# Altium PCB PCB1.PcbDoc
Units mm, origin at the board's own origin, x right, y up, seen from the top; angles counter-clockwise.
Board outline 99.5 x 59.5 mm, 2 copper layers (Top Layer, Bottom Layer); 9 components, 5 nets, 22 pads, 4 vias.
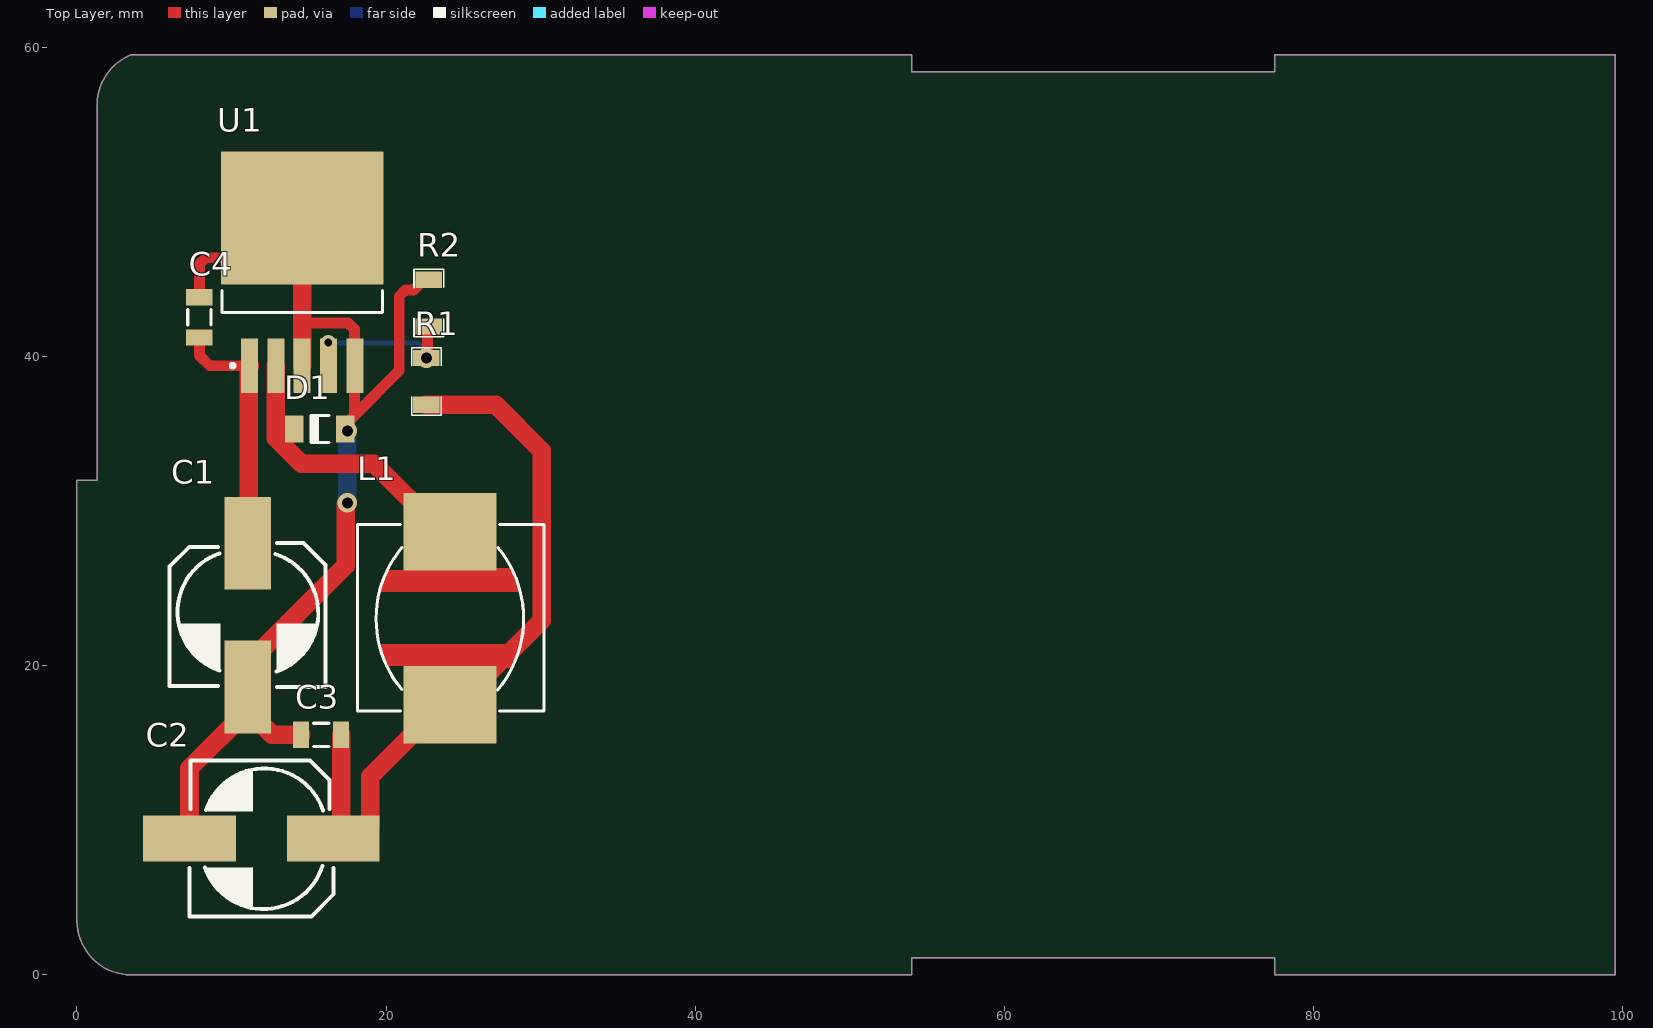
[diagram p0: Top Layer view]
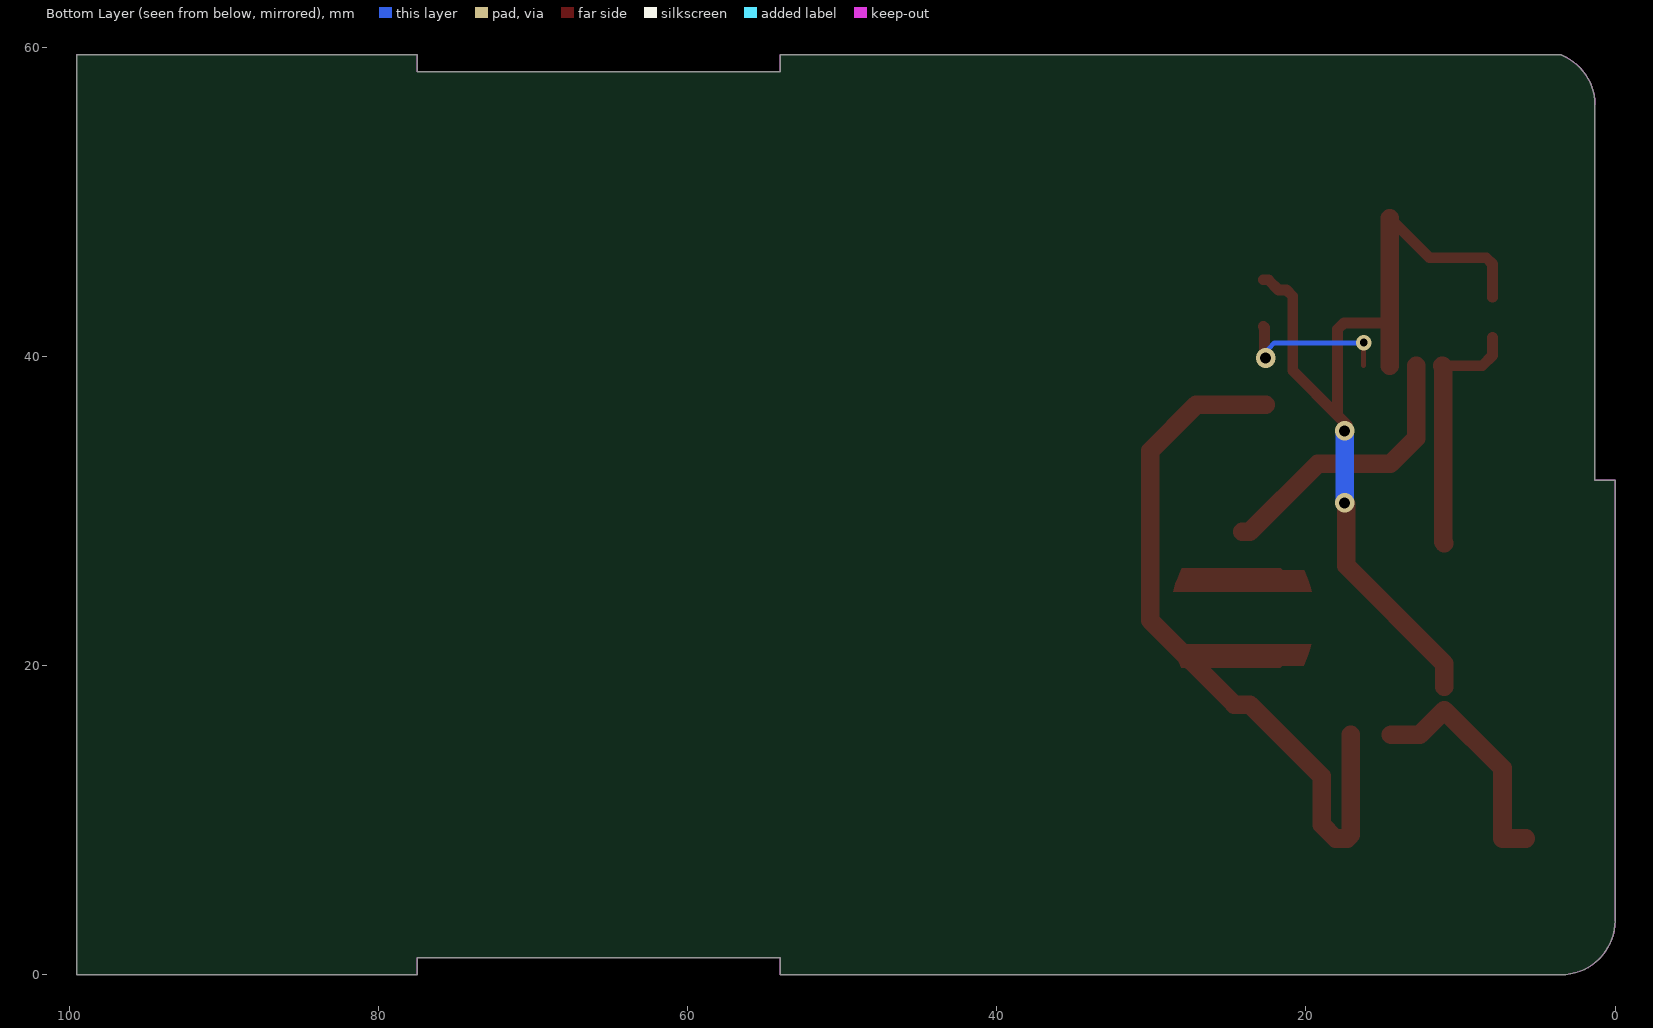
[diagram p1: Bottom Layer view, seen from below]
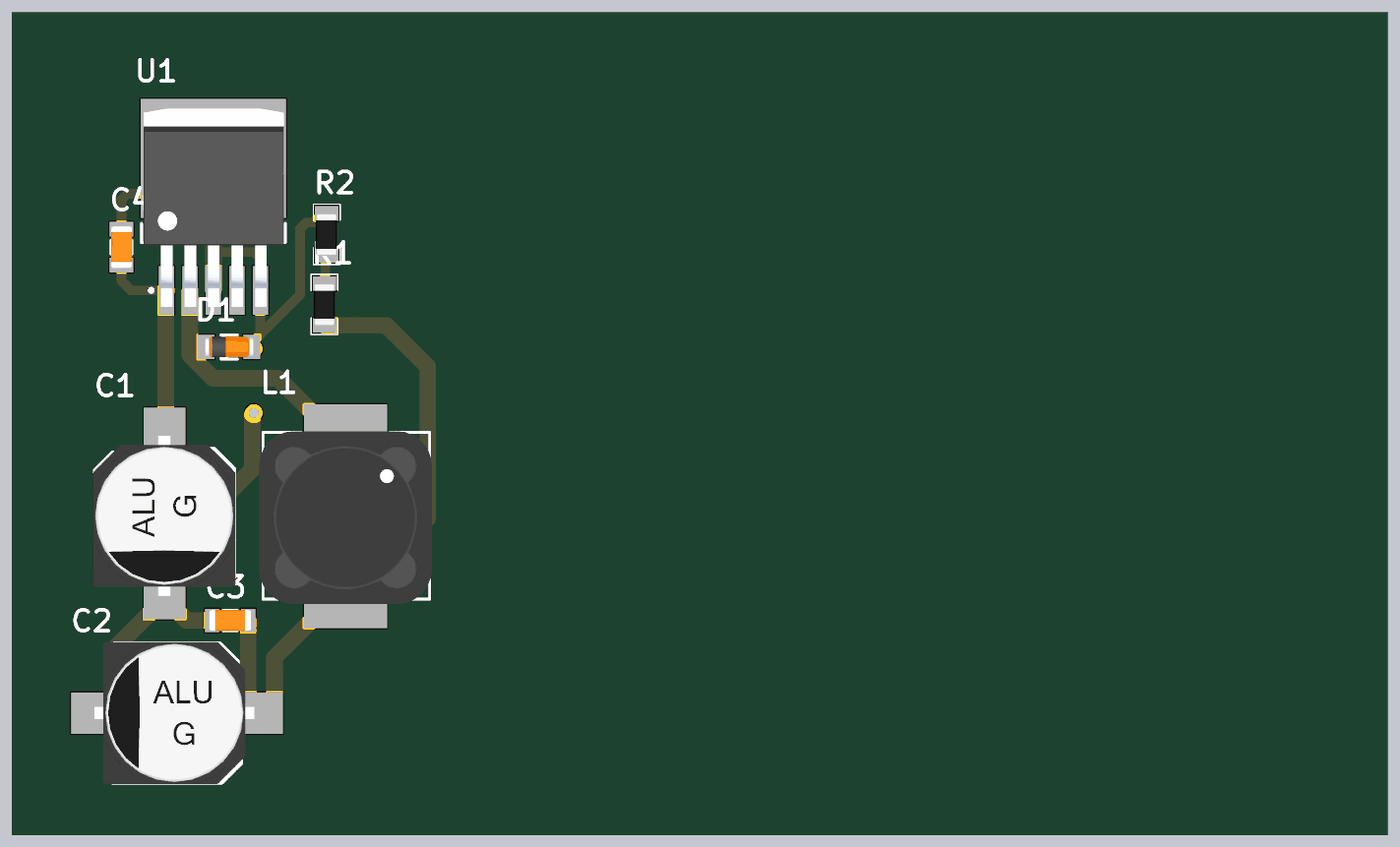
[diagram p2: 3D render of the assembled board from above, using the file's embedded part models]

## Layer stack, top to bottom
Top Solder: solder mask 0.0102, Solder Resist, Dk 3.5
Top Layer: signal copper 0.0356
Dielectric 1: dielectric 0.32, FR-4, Dk 4.8
Bottom Layer: signal copper 0.0356
Bottom Solder: solder mask 0.0102, Solder Resist, Dk 3.5

## Board outline
3.5,0 cw(c3.502,3.497) 0.005,3.5 0.005,32 1.304,32 1.304,56.282 cw(c4.804,56.252) 3.5,59.5 54,59.5 54,58.4 77.5,58.4 77.5,59.5 99.5,59.5 99.5,0 77.5,0 77.5,1.1 54,1.1 54,0

## Design rules (kind name [scope] priority, off if disabled: settings)
Clearance [All] p1: gap=0.254 ignorepadtopadclearanceinfootprint=FALSE except(0: Arc-Hole Track-Hole SMDPad-Hole THPad-Hole Via-Hole Fill-Hole Poly-Hole Region-Hole Text-Hole)
PolygonConnect [All] p1: connectstyle=Relief reliefconductorwidth=0.254 reliefentries=4 polygonreliefangle="90 Angle" airgapwidth=0.254
RoutingVias [All] p1: holewidth=0.711 width=1.27 viastyle="Through Hole" minholewidth=0.711 minwidth=1.27 maxholewidth=0.711 maxwidth=1.27
SolderMaskExpansion [All] p1: expansion=0.102 istentingtop=FALSE
Width [All] p1: maxlimit=1.2 minlimit=0.3 preferedwidth=0.7
30 further rules are at their usual default settings.

## Components (designator, comment, footprint, x,y, rotation, side; value= is the part's Value field where it differs from the comment)
C1 "220uF" Cap_Al_9.3MM 11.049,27.918 r90 top
C2 "220uF" Cap_Al_9.3MM 16.586,8.814 r0 top
C3 "100nF" SMD_CAP_1206 17.094,15.519 r180 top
C4 "100nF" SMD_CAP_1206 7.925,41.224 r90 top
D1 "D?" LL4148 15.698,35.306 r180 top
L1 "Inductor" induc-smd 24.13,23.063 r270 top
R1 "200R" "SMD RES 1206" 22.606,38.379 r270 top
R2 "120R" "SMD RES 1206" 22.758,43.447 r270 top
U1 "LM2596" "LM2596 12V SMD" 19.308,36.729 r90 top

## Footprints (in the part's own frame and the unit in brackets; to place one, negate y for a bottom-side part, rotate by r counter-clockwise, add the part's x,y. Pads: shape width x height; smd on the part's side, far side on the other; paste and mask are expansions set on the pad)
Cap_Al_9.3MM [mm]
  rect 6x3 smd: 1(0,0) 2(-9.3,0)
  silkscreen extent -9.3,-5.03 0.02,5.05, body extent -10.63,-5.13 0.97,5.17, height 10.2
induc-smd [mm]
  rect 5x6 smd: 1(-5.588,0) 2(5.588,0)
  Top Layer region: -3.099,-4.026 -2.769,-4.153 -2.464,-4.28 -2.057,-4.407 -1.702,-4.508 -1.702,4.458 -1.981,4.381 -2.311,4.28 -2.591,4.178 -2.845,4.077 -2.946,4.026 -3.073,3.975 -3.226,3.899 -3.226,-2.502 -3.099,-2.629
  Top Layer region: 3.073,-4 2.743,-4.127 2.438,-4.254 2.032,-4.381 1.676,-4.483 1.676,4.483 1.956,4.407 2.286,4.305 2.565,4.204 2.819,4.102 2.921,4.051 3.048,4.001 3.2,3.924 3.2,-2.476 3.073,-2.603
  silkscreen extent -6.07,-5.97 5.99,6.1, body extent -6.15,-6.25 6.35,6.25, height 6.9
LL4148 [mm] "MELF Diode, 2-Leads, Body 3.5x1.4mm, IPC Medium Density"
  rect 1.2x1.75 smd: 1(-1.65,0) 2(1.65,0)
  silkscreen extent -0.61,-0.88 0.57,0.87, body extent -1.78,-0.75 1.72,0.75, height 1.55
"LM2596 12V SMD" [mm]
  rect 3.5x1.1 smd: 1(2.667,8.128) 2(2.667,6.428) 3(2.667,4.728) 4(2.667,3.028) 5(2.667,1.328)
  rect 8.6x10.5 smd: 6(12.217,4.728)
  silkscreen extent 2.54,-0.47 7.52,9.93, body extent 1.46,-0.38 15.81,9.78, height 4.65
"SMD RES 1206" [mm] "Chip Resistor, 2-Leads, Body 3.2x1.6mm, IPC High Density _ (0.125 W)"
  rect 1.05x1.7 smd: 1(-1.512,0) 2(1.512,0)
  silkscreen extent -2.19,-0.95 2.17,0.98, body extent -1.51,-0.76 1.54,0.76, height 0.6
SMD_CAP_1206 [mm]
  rect 1.05x1.7 smd: 1(0,0) 2(2.596,0)
  silkscreen extent 0.8,-0.75 1.8,0.75, body extent -0.22,-0.77 2.82,0.75, height 0.75

## Part data
C1 C2: library part Cap-Polar, "Polar Capacitor", Voltage=50V, Adding Date=1387/12/20, Designer="Saeid Jorablo", Organazation=ControTec
C3 C4: library part Cap-Bipolar, "Bipolar Capacitor", Voltage=100V, Adding Date=1387/12/20, Designer="Saeid Jorablo", Organazation=ControTec
D1: library part Diode
R1 R2: library part Resistor, "Resistor", LatestRevisionDate=17-Jul-2002, LatestRevisionNote="Re-released for DXP Platform.", PackageDescription="Axial Device, Thru-Hole; 2 Leads; 0.3 in Pin Spacing", PackageReference=AXIAL-0.3, Published=8-Jun-2000, Publisher="Altium Limited"

## Via types
v1: diameter 1.27, hole 0.711, Top Layer to Bottom Layer, 3 vias
v2: diameter 1, hole 0.5, Top Layer to Bottom Layer, 1 vias

## Nets (pads, with @x,y where several pads share a name; then routed paths per layer and width w, separated by ;. In a path a pad name is that pad's centre, name@x,y a point inside that pad or via, vN(x,y) a via of type N, cw(c..) or ccw(c..) an arc to the next point about the centre after c; other vN are vias at no path point)
3V3: C2.1 C3.1 L1.2 R1.2 | length 46.9
  Top Layer w1.2: C3.1 17.094,9.056 17.336,8.814 18.086,8.814 18.986,9.714 18.986,12.831 23.63,17.475 L1.2 24.63,17.475 30.074,22.919 30.074,33.884 27.09,36.867 R1.2
24V: C1.1 C4.1 U1.1 | length 16.2
  Top Layer w0.7: C4.1 7.933,41.216 7.933,40.059 8.596,39.396 U1.1
  Top Layer w1.2: C1.1 11.13,27.999 11.13,39.346 U1.1
FB: R1.1 R2.2 U1.4 | length 10.6
  Top Layer w0.3: v2(16.256,40.894) 16.28,40.87 U1.4
  Top Layer w0.7: v1(22.606,39.891) 22.682,39.968 22.682,41.859 R2.2
  Bottom Layer w0.3: v2(16.256,40.894) 16.281,40.869 22.047,40.869 22.42,40.495 22.42,40.077 v1(22.606,39.891)
GND: C1.2 C2.2 C3.2 C4.2 D1.1 R2.1 U1.3 U1.5 U1.6 | length 75.7
  Top Layer w0.7: C4.2 7.925,45.974 8.335,46.384 12.018,46.384 U1.6 ; 14.58,41.754 14.99,42.164 17.543,42.164 17.953,41.754 17.953,36.186 ; D1.1@17.348,35.581 17.953,36.186 ; R2.1 22.433,44.959 21.775,44.301 21.263,44.301 20.853,43.891 20.853,39.086 17.953,36.186
  Top Layer w1.2: C2.2@5.786,8.814 C2.2 7.286,13.355 11.049,17.118 12.648,15.519 C3.2 ; C1.2 11.049,20.118 17.399,26.468 17.399,30.429 v1(17.501,30.531) ; U1.3 14.58,41.754 U1.6
  Bottom Layer w1.2: v1(17.501,30.531) v1(17.501,35.179)
OUT: D1.2 L1.1 U1.2 | length 18.4
  Top Layer w1.2: U1.2 12.88,34.712 14.546,33.045 19.236,33.045 23.63,28.651 L1.1

## Keep-outs
Keep-Out Layer:
  the board outline again, w0.01